# EAGLE board MCP73213 (EAGLE 6.4)
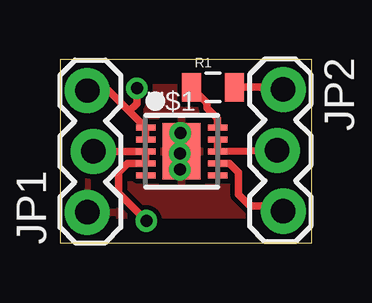
[diagram p0: board, top side]
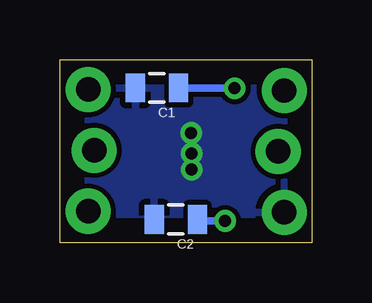
[diagram p1: board, bottom side, seen from below]

Size 10.5 x 7.63 mm. Coordinates in mm from the lower left corner, seen from the top.
Outline: 0,0 10.5,0 10.5,7.63 0,7.63 0,0
Copper layers (1*16): Top 0.035mm / dielectric 1.5mm / Bottom 0.035mm
Design rules "default": minimum track width 10mil, minimum drill 24mil, track to track 8mil, track to pad 8mil, pad to pad 8mil, via to via 8mil, smd to smd 8mil, copper to edge 40mil, drill to drill 8mil, minimum pad ring 10mil, minimum via ring 8mil, stop-mask expansion 4mil, vias tented up to drill 0mil, thermal gap 10mil

## Footprints (pad centres in the part's own frame; a part is rotated, then mirrored left to right if it is on the bottom)
0805 = smd 0.8 x 1.2: 1 -0.9,0; 2 0.9,0
1X03_LOCK = drill 1.016 pad 1.88: 1 0,0.127; 2 2.54,-0.127; 3 5.08,0.127
DFN10_3X3MM = smd 0.8 x 0.25: 1 -1.5,1; 2 -1.5,0.5; 3 -1.5,0; 4 -1.5,-0.5; 5 -1.5,-1; 6 1.5,-1; 7 1.5,-0.5; 8 1.5,0; 9 1.5,0.5; 10 1.5,1 | smd 1.58 x 2.35: GND 0,0

## Placement (x,y rotation side)
C1  [0805]  6.45,6.46 180 bottom
C2  [0805]  5.66,0.97 180 bottom
JP1  [1X03_LOCK]  1.27,1.27 90 top
JP2  [1X03_LOCK]  9.19,6.4 270 top
R1  2.32k  [0805]  6.39,6.49 0 top
U$1  [DFN10_3X3MM]  5.08,3.81 0 top

## Library data of the parts
C1 C2 JP1 JP2 R1 = SparkFun
U$1 = microbuilder

## Nets
GND: C1.2 C2.2 JP1.1 U$1.GND
N$1: C1.1 JP1.3 U$1.1 U$1.2
N$2: C2.1 JP1.2 U$1.3 U$1.4
N$3: R1.1 U$1.10
N$4: JP2.1 R1.2
N$5: JP2.2 U$1.8 U$1.9
N$6: JP2.3 U$1.7

## Tracks (layer width: path | path; a pad name or v marks a point on that pad's centre or on a via)
GND  (via drill 0.5)
  other vias: 5.02,4.58 5,3.72 5,3.05
  pour Top: 0,7.62 0,0 11.43,0 11.43,7.62
  pour Bottom: 0,7.62 0,0 11.43,0 11.43,7.62
N$1  (via drill 0.5)
  Top 0.305: JP1.3 2.04,6.35 2.89,5.5 | 2.89,5.5 U$1.1 U$1.2 | v3.21,6.44 3.21,5.82 2.89,5.5
  Bottom 0.305: C1.1 3.23,6.46 v3.21,6.44
N$2  (via drill 0.5)
  Top 0.305: JP1.2 U$1.3 U$1.4 2.82,3.31 2.44,2.93 2.44,2.07 v3.6,0.91
  Bottom 0.305: v3.6,0.91 4.7,0.91 C2.1
N$3
  Top 0.305: U$1.10 6.58,5.19 6.14,5.63 6.14,5.83 R1.1
N$4
  Top 0.305: R1.2 9.23,6.49 JP2.1
N$5
  Top 0.305: JP2.2 U$1.8 U$1.9
N$6
  Top 0.305: U$1.7 7.07,3.31 7.45,2.93 7.45,2.01 7.93,1.54 8.75,1.54 JP2.3